# Altium PCB PCB1.pcbdoc (part 2 of 3)
Units mil, origin at the board's own origin, x right, y up, seen from the top; angles counter-clockwise.
Board outline 4471.89 x 4515.94 mil, 4 copper layers (Top Layer, Inner1, Inner2, Bottom Layer); 115 components, 147 nets, 637 pads, 517 vias.
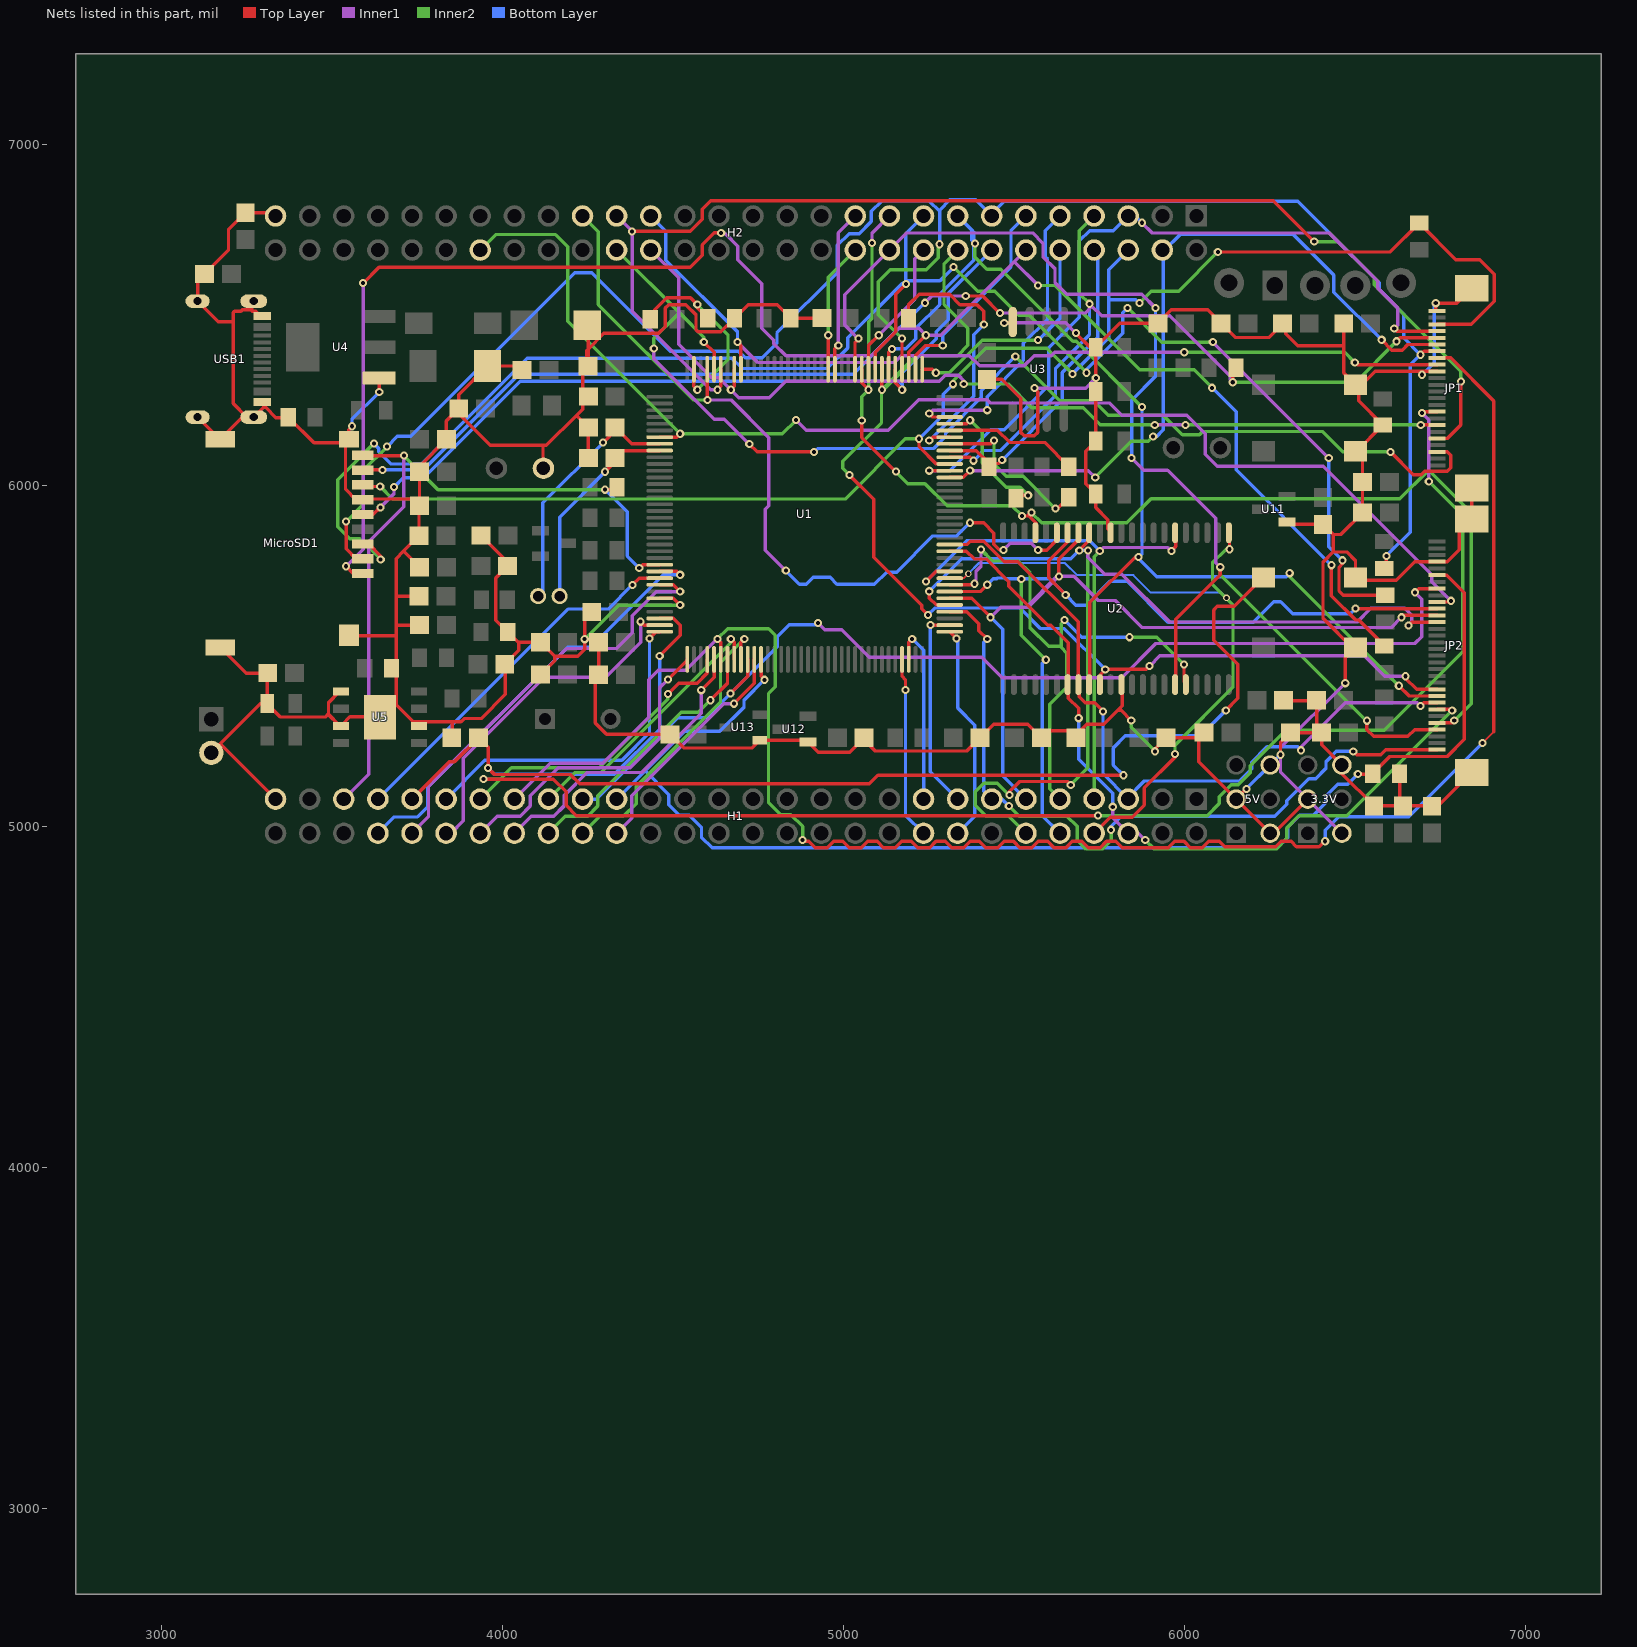
[diagram p4: the nets of this part, all layers, seen from the top]

## Via types
v1: diameter 24.02, hole 12.01, Top Layer to Bottom Layer, 515 vias
v2: diameter 19.68, hole 11.81, Top Layer to Bottom Layer, 2 vias

## Nets (pads, with @x,y where several pads share a name; then routed paths per layer and width w, separated by ;. In a path a pad name is that pad's centre, name@x,y a point inside that pad or via, vN(x,y) a via of type N, cw(c..) or ccw(c..) an arc to the next point about the centre after c; other vN are vias at no path point) (continued)
GND: 3.3V.2 3.3V.4 3.3V.6 5V.2 5V.4 5V.6 C1.1 C2.1 C3.1 C4.1 C5.2 C6.2 C7.1 C8.2 C9.2 C10.1 C11.1 C12.1 C13.1 C14.1 C15.1 C16.1 C17.1 C18.1 C19.1 C20.1 C21.1 C22.1 C23.1 C24.1 C25.1 C26.1 C27.2 C30.1 C31.1 C32.2 C35.1 C38.1 C40.1 C42.2 C47.1 C48.1 C49.1 C50.1 C55.1 C56.1 C83.2 C84.2 C85.2 C86.2 C87.2 C88.2 C89.2 C90.2 C91.2 D2.2 D4.2 D5.2 H1.55 H2.55 J1.2 JP1.15 JP1.24 JP1.25 JP1.26 JP2.29 JP2.33 JP2.34 KEY1.2 KEY2.2 KEY3.2 KEY4.2 L2.2 LED1.2 LED2.2 LED3.2 LED4.2 MicroSD1.6 MicroSD1.10 MicroSD1.11 MicroSD1.12 MicroSD1.13 R1.2 R2.2 R3.2 R8.2 R13.1 R14.1 U1.31 U2.12 U2.34 U3.4 U4.1 U5.1 U5.3 U5.6 U5.9 U11.1 U12.1 U13.1 USB1.1 USB1.2 USB1.3 USB1.4 USB1.A1 USB1.A12 USB1.B1 USB1.B12 | length 18530.7
  Top Layer w9.92: v1(4241.69,5549.88) 4241.69,5608.39 C55.1@4262.4,5629.09 ; U1.31@4461.69,5669.88 4501.69,5669.88 v1(4521.69,5649.88)
  Top Layer w10: USB1.4@3106.81,6200.87 3171.61,6136.06 MicroSD1.11@3173.23,6136.06 3238.03,6200.86 USB1.2@3251.38,6200.86 ; J1.2@3146.89,5216.73 3172.19,5242.04 ; MicroSD1.12@3173.23,5525.82 3249.62,5449.43 C30.1@3311.01,5449.43 ; 3267.01,6511.49 3266.38,6512.12 ; USB1.1@3271.38,6541.03 3266.38,6536.02 3266.38,6512.12 ; USB1.B1@3296.97,6250.86 USB1.A12@3296.97,6239.05 3306.29,6229.73 ; USB1.B12@3296.97,6491.02 USB1.A1@3285.97,6502.03 ; USB1.A1@3296.97,6502.83 USB1.A1@3285.97,6502.03 ; D4.2@3310.54,5360.94 D4.2@3311.01,5360.48 ; C30.1@3312.52,5450.94 C30.1@3311.01,5449.43 ; H1.55@3335.43,5080.94 3174.34,5242.04 3172.19,5242.04 ; H2.55@3335.43,6790.94 3326.06,6800.31 C16.1@3246.89,6800.31 3197.25,6750.67 3197.25,6690.67 C17.1@3127.52,6620.94 3106.81,6600.23 USB1.3@3106.81,6541.03 3166.97,6480.86 3211.38,6480.86 ; R8.2@3372.52,6200.94 R8.2@3373.78,6199.68 ; U5.3@3527.39,5295.94 U5.3@3530.53,5299.09 ; U5.1@3527.39,5395.94 3522.39,5395.94 3490.53,5364.09 3490.53,5331.59 ; MicroSD1.13@3551.18,5561.25 3552.01,5560.43 3689.03,5560.43 ; MicroSD1.10@3551.18,6136.06 MicroSD1.10@3549.39,6134.27 ; v1(3559.39,6174.27) 3549.39,6164.27 MicroSD1.10@3549.39,6134.27 ; U4.1@3638.5,6315.39 3639.39,6314.51 v1(3639.39,6274.27) ; U5.9@3641.89,5320.94 U5.9@3643.01,5322.07 ; R14.1@3675.67,5464.02 3676.77,5462.93 R14.1@3689.03,5462.93 ; C90.2@3756.26,5675.94 3755.74,5675.43 3689.03,5675.43 ; U5.6@3756.53,5296.09 3756.53,5307.93 ; C84.2@3757.52,5590.94 3757,5590.43 3689.03,5590.43 ; C83.2@3757.52,5760.94 3710.95,5807.52 3710.24,5807.52 ; C38.1@3852.02,5260.76 3854.03,5262.77 3854.03,5307.93 ; C18.1@3937.62,5854.07 4016.06,5775.63 C15.1@4016.06,5764.07 3981.26,5729.27 3981.26,5605.95 R13.1@4016.26,5570.94 4046.66,5540.54 4047.92,5540.54 ; C27.2@4007.31,5476.2 C27.2@4009.03,5477.93 ; C20.1@4058.21,6339.07 4046.34,6350.94 D5.2@3956.38,6350.94 3872.52,6267.09 C40.1@3872.52,6225.94 C40.1@3864.55,6217.97 ; C4.1@4112.52,5445.94 4153.58,5487 4153.58,5499.88 ; C31.1@4112.52,5540.94 C31.1@4112.92,5540.54 ; C32.2@4120.79,6050.94 4119.55,6052.19 4119.55,6117.97 ; D2.2@4249.83,6470.94 4252.02,6468.76 4252.02,6400.28 ; C3.1@4252.51,6080.77 C1.1@4252.51,6170.91 4218.09,6205.33 4218.09,6206.36 ; C5.2@4252.52,6260.94 4250.61,6259.04 C5.2@4235.77,6259.04 ; C14.1@4937.52,6491.48 4936.99,6490.94 R3.2@4846.26,6490.94 4806.26,6530.94 4721.26,6530.94 R2.2@4681.26,6490.94 4641.26,6450.94 4573.91,6450.94 4568.14,6456.71 4568.14,6500.94 4538.14,6530.94 4488.14,6530.94 4478.14,6520.94 4478.14,6466.41 4458.14,6446.41 4298.14,6446.41 4252.02,6400.28 ; C6.2@5061.26,5260.94 C6.2@5057.75,5257.44 ; C7.1@5421.89,6311.57 5464.91,6311.57 5520.54,6255.94 5520.54,6155.94 5530.54,6145.94 5560.54,6145.94 5570.54,6155.94 5570.54,6275.94 v1(5560.54,6285.94) ; v1(5472.01,6477.41) 5494.38,6477.41 U3.4@5496.89,6479.92 ; v1(5682.01,6447.41) 5722.01,6407.41 LED1.2@5742.01,6407.41 ; C49.1@5682.52,5260.94 C49.1@5678.43,5265.03 ; U2.34@5786.14,5863.6 5775.9,5873.85 5775.9,5900.59 5740.54,5935.94 LED4.2@5740.54,5975.94 5710.54,6005.94 5710.54,6100.94 LED3.2@5740.54,6130.94 LED2.2@5740.54,6275.94 v1(5740.54,6315.94) LED1.2@5740.54,6405.94 LED1.2@5742.01,6407.41 ; U2.12@5817.64,5418.28 5817.64,5354.24 5804.44,5341.05 ; v1(5844.44,5311.05) 5814.44,5341.05 5804.44,5341.05 ; v1(5914.44,5221.05) 5914.44,5229.13 C13.1@5946.26,5260.94 C12.1@6042.52,5260.94 ; C50.1@5922.52,6475.94 C50.1@5922.93,6476.35 ; C12.1@6057.52,5275.94 C12.1@6042.52,5260.94 ; v1(6181.89,5110.94) 5V.2@6151.89,5080.94 ; v1(6281.89,5210.94) 6281.89,5246.57 C87.2@6311.26,5275.94 C23.1@6388.76,5275.94 ; C11.1@6287.52,6475.94 C11.1@6288.88,6474.58 ; C24.1@6291.26,5370.94 6292.5,5369.7 C22.1@6388.76,5369.7 ; U11.1@6301.26,5893.54 6308.23,5886.57 C47.1@6406.89,5886.57 6436.64,5856.83 ; 3.3V.2@6361.89,5080.94 6261.89,4980.94 5V.4@6251.89,4980.94 5V.2@6151.89,5080.94 ; C22.1@6387.52,5370.94 C22.1@6388.76,5369.7 ; C48.1@6467.52,6475.94 6467.52,6410.39 ; v1(6471.89,5420.94) 6471.89,5495.87 KEY4.2@6496.64,5520.62 ; KEY4.2@6501.97,5525.94 KEY4.2@6496.64,5520.62 ; KEY3.2@6501.97,5730.94 KEY3.2@6501.97,5732.79 ; KEY2.2@6501.97,6100.94 KEY2.2@6503.08,6099.84 ; R1.2@6631.26,5155.94 C86.2@6631.26,5060.94 ; v1(6697.11,6325.16) v1@6697.11,6335.16 ; JP1.15@6741.2,6335.16 v1@6697.11,6335.16 ; JP1.24@6741.2,6512.32 6737.11,6516.41 v1(6737.11,6535.16) 6798.88,6535.16 JP1.25@6842.58,6578.86 ; JP2.34@6842.58,5159.29 6743.31,5060.02 C9.2@6726.21,5060.02 6725.28,5060.94 C86.2@6641.26,5060.94 C86.2@6631.26,5060.94 ; JP1.26@6842.58,5993.03 JP2.33@6842.58,5902.6 6806.56,5866.58 6806.56,5812.37 6771.2,5777.01 JP2.29@6741.2,5777.01 6676.18,5777.01 6621.97,5722.79 6511.97,5722.79 KEY3.2@6501.97,5732.79 ; 3172.19,5242.04 3290.63,5360.48 D4.2@3311.01,5360.48 ; 3211.38,6480.86 3211.38,6240.86 USB1.2@3251.38,6200.86 ; 3211.38,6480.86 3211.38,6507.88 3215,6511.49 3234.01,6511.49 3237.84,6515.32 3263.18,6515.32 3266.38,6512.12 ; USB1.2@3251.38,6200.86 USB1.2@3271.38,6200.87 3300.25,6229.73 3306.29,6229.73 ; 3266.38,6512.12 3266.38,6510.86 3277.13,6510.86 USB1.A1@3285.97,6502.03 ; 3306.29,6229.73 3336.34,6199.68 R8.2@3373.78,6199.68 ; D4.2@3311.01,5360.48 C30.1@3311.01,5449.43 ; D4.2@3311.01,5360.48 3349.9,5321.59 3480.53,5321.59 3490.53,5331.59 ; R8.2@3373.78,6199.68 3448.03,6125.43 MicroSD1.10@3540.55,6125.43 ; 3490.53,5331.59 3490.53,5329.09 3520.53,5299.09 U5.3@3530.53,5299.09 ; U5.3@3530.53,5299.09 3553.51,5322.07 U5.9@3643.01,5322.07 ; MicroSD1.10@3540.55,6125.43 3540.55,5988.89 3570.55,5958.89 MicroSD1.6@3590.55,5958.89 3592.6,5960.94 C19.1@3757.52,5960.94 ; MicroSD1.10@3540.55,6125.43 MicroSD1.10@3549.39,6134.27 ; U5.9@3643.01,5322.07 3678.37,5357.42 3689.53,5357.42 ; R14.1@3689.03,5462.93 3689.03,5357.93 3689.53,5357.42 ; R14.1@3689.03,5462.93 3689.03,5560.43 ; 3689.03,5560.43 3689.03,5590.43 ; 3689.03,5590.43 3689.03,5675.43 ; 3689.03,5675.43 3689.03,5786.3 3710.24,5807.52 ; 3689.53,5357.42 3739.03,5307.93 3756.53,5307.93 ; 3710.24,5807.52 C91.2@3755.89,5853.17 3755.89,5939.32 C19.1@3757.52,5940.94 C19.1@3757.52,5960.94 ; 3756.53,5307.93 3854.03,5307.93 ; C19.1@3757.52,5960.94 C21.1@3757.52,6040.94 3757.52,6057.2 C89.2@3836.26,6135.94 3836.26,6189.68 C40.1@3864.55,6217.97 ; 3854.03,5307.93 3879.03,5307.93 3888.32,5317.22 3938.32,5317.22 4009.03,5387.93 C27.2@4009.03,5477.93 ; C40.1@3864.55,6217.97 3964.55,6117.97 4119.55,6117.97 ; C27.2@4009.03,5477.93 4047.92,5516.82 4047.92,5540.54 ; 4047.92,5540.54 C31.1@4112.92,5540.54 ; C31.1@4112.92,5540.54 4153.58,5499.88 ; 4119.55,6117.97 4129.7,6117.97 4218.09,6206.36 ; 4153.58,5499.88 4221.69,5499.88 4241.69,5519.88 v1(4241.69,5549.88) 4273.58,5549.88 C26.1@4282.52,5540.94 C2.1@4282.51,5445.58 4272.52,5435.59 4272.52,5304.08 4305.66,5270.94 C25.1@4492.52,5270.94 4532.52,5230.94 4732.92,5230.94 U13.1@4755.52,5253.54 4891.26,5253.54 U12.1@4896.26,5248.54 4926.26,5218.54 5018.86,5218.54 C6.2@5057.75,5257.44 ; 4218.09,6206.36 4235.77,6224.04 C5.2@4235.77,6259.04 ; C5.2@4235.77,6259.04 4235.77,6334.04 C35.1@4248.14,6346.41 ; C35.1@4248.14,6346.41 4248.14,6396.41 4252.02,6400.28 ; C35.1@4248.14,6346.41 C35.1@4252.02,6350.28 4252.02,6400.28 ; C6.2@5057.75,5257.44 5093.11,5222.08 5362.4,5222.08 C85.2@5401.26,5260.94 5441.26,5300.94 5541.26,5300.94 C88.2@5581.26,5260.94 5601.26,5280.94 5662.52,5280.94 C49.1@5678.43,5265.03 ; C49.1@5678.43,5265.03 5713.79,5300.39 5763.79,5300.39 5804.44,5341.05 ; LED1.2@5742.01,6407.41 5810.95,6476.35 C50.1@5922.93,6476.35 ; C50.1@5922.93,6476.35 5961.82,6515.24 6068.22,6515.24 C56.1@6107.52,6475.94 6148.88,6434.58 6248.88,6434.58 C11.1@6288.88,6474.58 ; C12.1@6042.52,5260.94 6042.52,5190.31 5V.2@6151.89,5080.94 ; C11.1@6288.88,6474.58 6297.72,6465.75 6297.72,6445.75 6333.08,6410.39 6467.52,6410.39 ; C23.1@6388.76,5275.94 C22.1@6388.76,5369.7 ; C23.1@6388.76,5275.94 C23.1@6402.52,5275.94 6402.52,5240.31 3.3V.6@6461.89,5180.94 6461.89,5155.31 C8.2@6556.26,5060.94 C86.2@6631.26,5060.94 ; 6436.64,5805.62 6406.64,5775.62 6406.64,5610.62 KEY4.2@6496.64,5520.62 ; 6436.64,5805.62 6476.64,5805.62 6501.97,5780.29 KEY3.2@6501.97,5732.79 ; 6436.64,5805.62 6436.64,5856.83 ; 6436.64,5856.83 6458.4,5856.83 C10.1@6522.52,5920.94 C42.2@6522.52,6010.94 6522.52,6080.39 KEY2.2@6503.08,6099.84 ; 6467.52,6410.39 6467.52,6330.39 KEY1.2@6501.97,6295.94 KEY1.2@6511.18,6286.73 ; KEY2.2@6503.08,6099.84 6503.82,6099.84 L2.2@6581.89,6177.9 6511.18,6248.62 KEY1.2@6511.18,6286.73 ; KEY1.2@6511.18,6286.73 6559.61,6335.16 v1@6697.11,6335.16
  Inner1 w10: v1(5472.01,6477.41) 5652.01,6477.41 v1(5682.01,6447.41) ; v1(5560.54,6285.94) 5710.54,6285.94 v1(5740.54,6315.94) ; 3.3V.4@6461.89,4980.94 3.3V.2@6361.89,5080.94 6281.89,5160.94 v1(6281.89,5210.94) 6281.89,5230.94 v1(6471.89,5420.94)
  Inner2 w9.92: v1(4241.69,5549.88) 4341.69,5649.88 v1(4521.69,5649.88)
  Inner2 w10: v1(5844.44,5311.05) 5844.44,5291.05 v1(5914.44,5221.05)
  Bottom Layer w10: v1(3559.39,6174.27) 3559.39,6194.27 v1(3639.39,6274.27) ; v1(6181.89,5110.94) 5V.6@6251.89,5180.94 v1(6281.89,5210.94) ; v1(6697.11,6325.16) 6732.47,6360.52 6732.47,6530.52 v1(6737.11,6535.16)
I2C1_SCL: H2.35 JP1.5 U1.139 | length 3655.4
  Top Layer w9.92: v1(4380.83,6745.55) 4550.83,6745.55 4586.19,6780.9 4586.19,6810.9 4610.83,6835.55 6260.83,6835.55 v1(6380.83,6715.55) ; v1(4630.83,6281.14) 4640.83,6291.14 U1.139@4640.83,6341.14 ; JP1.5@6741.2,6138.3 6771.2,6138.3 6810.83,6177.93 v1(6810.83,6305.55)
  Inner1 w9.92: H2.35@4335.43,6790.94 v1(4380.83,6745.55) 4380.83,6511.14 4610.83,6281.14 v1(4630.83,6281.14)
  Inner2 w9.92: v1(6380.83,6715.55) 6450.83,6715.55 6556.9,6609.48 6556.9,6589.48 6810.83,6335.55 v1(6810.83,6305.55)
I2C1_SDA: H2.36 JP1.3 U1.140 | length 3461.5
  Top Layer w9.92: v1(4591.14,6421.14) 4621.14,6391.14 U1.140@4621.14,6341.14 ; v1(4724.49,6121.89) 4747.45,6098.93 v1(4914.49,6098.93) ; v1(6604.49,6098.93) 6671.2,6032.22 6694.49,6032.22 6704.49,6042.22 6771.2,6042.22 6781.2,6052.22 6781.2,6088.93 6771.2,6098.93 JP1.3@6741.2,6098.93
  Inner1 w9.92: v1(4444.49,6401.89) 4444.49,6371.89 4621.27,6195.11 4651.27,6195.11 v1(4724.49,6121.89)
  Inner2 w9.92: H2.36@4335.43,6690.94 4524.49,6501.89 ; v1(4444.49,6401.89) 4444.49,6431.89 4514.49,6501.89 4524.49,6501.89 ; v1(4591.14,6421.14) 4591.14,6435.24 4524.49,6501.89 ; v1(5504.49,6378.93) 5634.49,6248.93 5734.49,6248.93 5777.49,6205.93 5937.49,6205.93 5994.49,6148.93 6044.49,6148.93 6054.49,6158.93 6404.49,6158.93 6464.49,6098.93 v1(6604.49,6098.93)
  Bottom Layer w9.92: v1(4914.49,6098.93) 4924.49,6108.93 5264.49,6108.93 5299.85,6144.29 5299.85,6154.29 5404.49,6258.93 5404.49,6278.93 v1(5504.49,6378.93)
PA0: C38.2 H1.47 KEY3.1 U1.34 | length 4217.5
  Top Layer w9.92: C38.2@3930.76,5260.76 3958.71,5232.81 v1(3958.71,5171.76) 3977.36,5153.11 4199.41,5153.11 4226.69,5125.82 5076.69,5125.82 5101.69,5150.82 v1(5821.69,5150.82) ; v1(4461.69,5500.82) 4521.69,5560.82 4521.69,5590.82 4501.69,5610.82 U1.34@4461.69,5610.82 ; v1(6121.69,5340.82) 6157.05,5376.18 6157.05,5476.18 6086.34,5546.89 6086.34,5635.47 6097.01,5646.14 6147.01,5646.14 KEY3.1@6231.82,5730.94
  Top Layer w10: H1.47@3735.43,5080.94 3844.54,5190.05 3860.05,5190.05 C38.2@3930.76,5260.76
  Bottom Layer w9.92: v1(3958.71,5171.76) 3976.77,5153.7 4329.18,5153.7 4461.69,5286.21 v1(4461.69,5500.82) ; v1(5821.69,5150.82) 5791.69,5180.82 5791.69,5230.82 5827.05,5266.18 6047.05,5266.18 v1(6121.69,5340.82)
PA1: H1.46 U1.35 | length 1030.5
  Top Layer w9.92: v1(4405.63,5601.14) 4415.63,5591.14 U1.35@4461.69,5591.14
  Inner1 w10: H1.46@3835.43,4980.94 3849.81,4980.94 3886.22,5017.36 3886.22,5201.33 4123.51,5438.62 4303.55,5438.62 4405.63,5540.71 v1(4405.63,5601.14)
PA2: H1.45 U1.36 | length 991.3
  Top Layer w9.92: v1(4431.69,5551.45) 4451.69,5571.45 U1.36@4461.69,5571.45
  Bottom Layer w9.92: H1.45@3835.43,5080.94 3949.2,5194.71 4351.21,5194.71 4431.69,5275.2 v1(4431.69,5551.45)
PA3: H1.44 U1.37 | length 924.7
  Top Layer w9.92: v1(4485.68,5431.36) 4542.4,5488.08 U1.37@4542.4,5490.74
  Inner1 w9.92: H1.44@3935.43,4980.94 3985.23,5030.74 4052.4,5030.74 4082.4,5060.74 4082.4,5090.74 4164.18,5172.52 4376.03,5172.52 4461.03,5257.52 4461.03,5406.71 v1(4485.68,5431.36)
PA4: H1.43 JP1.9 U1.40 | length 4875.3
  Top Layer w9.92: v1(3944.8,5139.68) 4150.16,5139.68 4187.16,5102.68 4187.16,5062.68 4217.16,5032.68 v1(5746.84,5032.68) ; v1(4485.86,5388.86) 4517.74,5420.74 4571.46,5420.74 4601.46,5450.74 U1.40@4601.46,5490.74 ; v1(6696.84,6212.68) 6701.2,6217.04 JP1.9@6741.2,6217.04
  Inner1 w9.92: v1(6696.84,6212.68) 6716.84,6192.68 v1(6716.84,6012.68)
  Inner2 w9.92: H1.43@3935.43,5080.94 3994.17,5139.68 ; v1(3944.8,5139.68) 3994.17,5139.68 ; v1(4485.86,5388.86) 4485.86,5373.76 4284.61,5172.52 4027.01,5172.52 3994.17,5139.68 ; v1(5746.84,5032.68) 6066.84,5032.68 6102.19,5068.03 6102.19,5088.03 6137.55,5123.39 6157.55,5123.39 6192.9,5158.74 6192.9,5178.74 6296.84,5282.68 6586.84,5282.68 6816.84,5512.68 6816.84,5912.68 v1(6716.84,6012.68)
PA5: H1.42 U1.41 | length 884.9
  Top Layer w9.92: v1(4583.59,5400.42) 4621.14,5437.96 U1.41@4621.14,5490.74
  Inner1 w9.92: H1.42@4035.43,4980.94 4085.23,5030.74 4151.14,5030.74 4181.14,5060.74 4181.14,5090.74 4249.49,5159.09 4409.84,5159.09 4583.59,5332.84 v1(4583.59,5400.42)
PA6: H1.41 JP1.17 U1.42 | length 5342.6
  Top Layer w5.91: v1(6874.41,5245.71) 6907.42,5278.71
  Top Layer w9.92: v1(4630.83,5550.74) 4640.83,5540.74 U1.42@4640.83,5490.74 ; v1(4880.83,4960.74) 4884.27,4957.31 4899.05,4957.31 4917.85,4938.5 4953.01,4938.5 4971.82,4957.31 4999.05,4957.31 5017.85,4938.5 5053.01,4938.5 5071.82,4957.31 5099.05,4957.31 5117.85,4938.5 5153.01,4938.5 5171.82,4957.31 5199.05,4957.31 5217.85,4938.5 5253.01,4938.5 5271.82,4957.31 5299.05,4957.31 5317.85,4938.5 5353.01,4938.5 5371.82,4957.31 5399.05,4957.31 5417.85,4938.5 5453.01,4938.5 5471.82,4957.31 5499.05,4957.31 5517.85,4938.5 5553.01,4938.5 5571.82,4957.31 5599.05,4957.31 5617.85,4938.5 5653.01,4938.5 5671.82,4957.31 5699.05,4957.31 5717.85,4938.5 5753.01,4938.5 5771.82,4957.31 5799.05,4957.31 5818.37,4937.99 5894.94,4937.99 5895.45,4938.5 5953.01,4938.5 5971.82,4957.31 5999.05,4957.31 6017.85,4938.5 6053.01,4938.5 6071.82,4957.31 6102.96,4957.31 6118.81,4941.46 6268.25,4941.46 6284.1,4957.31 6312.96,4957.31 6328.81,4941.46 6394.97,4941.46 6410.82,4957.31 v1(6413.03,4957.31) ; JP1.17@6741.2,6374.53 6781.2,6374.53 6907.42,6248.31 6907.42,5278.71
  Inner1 w10: H1.41@4035.43,5080.94 4140.47,5185.98 4295,5185.98 4429.53,5320.51 4429.53,5430.75 4457.09,5458.31 4538.39,5458.31 v1(4630.83,5550.74)
  Inner2 w9.92: v1(4630.83,5550.74) 4660.83,5580.74 4780.83,5580.74 4800.83,5560.74 4800.83,5410.74 4780.83,5390.74 4780.83,5070.74 4816.19,5035.39 4846.19,5035.39 4880.83,5000.74 v1(4880.83,4960.74)
  Bottom Layer w10: v1(6413.03,4957.31) 6413.03,4989.05 6453.15,5029.17 6657.88,5029.17 v1(6874.41,5245.71)
PA7: H1.40 U1.43 | length 794.8
  Top Layer w9.92: v1(4610.51,5370.74) 4660.51,5420.74 U1.43@4660.51,5490.74
  Inner2 w9.92: H1.40@4135.43,4980.94 4185.23,5030.74 4250.51,5030.74 4280.51,5060.74 4280.51,5090.74 4525.16,5335.39 4575.16,5335.39 v1(4610.51,5370.74)
PA8: H2.8 R54.1 U1.100 | length 921
  Top Layer w9.92: U1.100@5312.09,6102.95 5390.51,6102.95 5425.87,6067.6 5425.87,6065.12 5425.87,6057.6 R54.1@5427.52,6055.94
  Top Layer w10: R54.1@5425.87,6065.12 5455.87,6065.12 v1(5465.87,6075.12)
  Bottom Layer w10: v1(5465.87,6075.12) 5642.64,6251.9 5642.64,6331.9 5745.87,6435.12 5745.87,6680.51 H2.8@5735.43,6690.94
PA9: R7.2 U1.101 | length 491
  Top Layer w9.92: U1.101@5312.09,6122.63 5432.09,6122.63 v1(5442.09,6132.63) ; v1(5622.09,5932.63) 5627.95,5932.63 R7.2@5661.26,5965.94
  Inner2 w9.92: v1(5442.09,6132.63) 5442.09,6062.63 5477.45,6027.28 5527.45,6027.28 v1(5622.09,5932.63)
PA10: R12.2 U1.102 | length 802.5
  Top Layer w9.92: R12.2@5191.26,6490.94 5191.26,6530.11 5222.09,6560.94 5312.09,6560.94 5342.09,6530.94 5392.09,6530.94 5412.09,6510.94 v1(5412.09,6472.32) ; v1(5252.09,6132.32) 5262.09,6142.32 U1.102@5312.09,6142.32
  Bottom Layer w9.92: v1(5252.09,6132.32) 5382.09,6262.32 5382.09,6442.32 v1(5412.09,6472.32)
PA11: R9.2 U1.103 | length 393.1
  Top Layer w9.92: U1.103@5312.09,6162 5452.09,6162 5487.45,6126.65 5590.56,6126.65 R9.2@5661.26,6055.94
PA12: R10.2 U1.104 | length 416.7
  Top Layer w9.92: U1.104@5312.09,6181.69 5362.09,6181.69 v1(5372.09,6191.69) ; R10.2@5506.76,5963.53 5514.92,5971.69 v1(5542.09,5971.69)
  Inner2 w9.92: v1(5372.09,6191.69) 5407.45,6156.34 5407.45,6066.34 5478.16,5995.63 5518.16,5995.63 v1(5542.09,5971.69)
PA13: H2.9 U1.105 | length 901.8
  Top Layer w9.92: v1(5252.09,6211.37) 5262.09,6201.37 U1.105@5312.09,6201.37
  Inner1 w9.92: v1(5252.09,6211.37) 5262.09,6221.37 v1(5422.09,6221.37)
  Bottom Layer w9.92: v1(5422.09,6221.37) 5422.09,6261.37 5528.16,6367.44 5528.16,6417.44 5598.87,6488.15 5598.87,6664.6 5592.09,6671.37 5592.09,6747.6 H2.9@5635.43,6790.94
PA14: H2.10 U1.109 | length 674.4
  Top Layer w9.92: U1.109@5231.38,6341.14 5261.38,6341.14 v1(5271.38,6331.14)
  Inner2 w9.92: v1(5271.38,6331.14) 5311.38,6331.14 5407.13,6426.89 v1(5571.38,6426.89)
  Bottom Layer w9.92: v1(5571.38,6426.89) 5635.43,6490.94 H2.10@5635.43,6690.94
PA15: H2.11 U1.110 | length 613.2
  Top Layer w9.92: U1.110@5211.69,6341.14 5211.69,6381.14 5241.69,6411.14 v1(5291.69,6411.14)
  Bottom Layer w9.92: v1(5291.69,6411.14) 5291.69,6441.14 5491.69,6641.14 5491.69,6747.2 H2.11@5535.43,6790.94
PB0: H1.37 JP2.25 U1.46 | length 3136.7
  Top Layer w9.92: v1(4669.57,5390.74) 4719.57,5440.74 U1.46@4719.57,5490.74 ; v1(6676.06,5687.24) 6687.1,5698.27 JP2.25@6741.2,5698.27
  Inner1 w9.92: v1(4926.06,5597.24) 4946.06,5577.24 4996.06,5577.24 5076.06,5497.24 5406.06,5497.24 5466.06,5437.24 5816.06,5437.24 5916.06,5537.24 6676.06,5537.24 6696.06,5557.24 6696.06,5667.24 v1(6676.06,5687.24)
  Bottom Layer w9.92: H1.37@4235.43,5080.94 4275.41,5080.94 4514.5,5320.03 4598.86,5320.03 v1(4669.57,5390.74) 4806.06,5527.24 4806.06,5557.24 4841.42,5592.59 4921.42,5592.59 v1(4926.06,5597.24)
PB1: H1.36 U1.47 | length 694.6
  Top Layer w9.92: v1(4679.25,5360.74) 4739.25,5420.74 U1.47@4739.25,5490.74
  Inner1 w9.92: H1.36@4335.43,4980.94 4379.25,5024.76 4379.25,5090.74 4649.25,5360.74 v1(4679.25,5360.74)
PB2: H1.35 JP2.27 R1.1 U1.48 | length 3878.1
  Top Layer w9.92: U1.48@4758.94,5490.74 4758.94,5440.74 v1(4768.94,5430.74) ; v1(6508.77,5154.28) 6550.85,5154.28 R1.1@6552.52,5155.94
  Top Layer w10: R1.1@6552.52,5155.94 6602.52,5205.94 6771.2,5205.94 6821.2,5255.94 6821.2,5685.94 6769.51,5737.64 JP2.27@6741.2,5737.64
  Bottom Layer w9.92: H1.35@4335.43,5080.94 4418.77,5164.28 ; v1(4768.94,5430.74) 4708.94,5370.74 4708.94,5350.74 4638.23,5280.03 4534.52,5280.03 4418.77,5164.28 ; v1(6508.77,5154.28) 6479.48,5124.99 6449.48,5124.99 6414.12,5089.63 6414.12,5069.63 6378.77,5034.28 6338.77,5034.28 6304.12,4999.63 6304.12,4969.63 6272.28,4937.79 4615.25,4937.79 4584.12,4968.92 4584.12,4998.92 4548.77,5034.28 4518.77,5034.28 4488.77,5064.28 4488.77,5094.28 4418.77,5164.28
PB6: H2.33 JP1.16 U1.136 | length 2687.8
  Top Layer w9.92: v1(4689.88,6421.14) 4699.88,6411.14 U1.136@4699.88,6341.14 ; v1(6499.88,6361.14) 6506.19,6354.84 JP1.16@6741.2,6354.84
  Inner1 w9.92: v1(4689.88,6421.14) 4749.88,6361.14 5149.88,6361.14 5169.88,6381.14 5369.88,6381.14 5399.88,6351.14 5529.88,6351.14 5559.88,6381.14 5609.88,6381.14 5619.88,6391.14 v1(5999.88,6391.14)
  Inner2 w9.92: v1(5999.88,6391.14) 6469.88,6391.14 v1(6499.88,6361.14)
  Bottom Layer w9.92: H2.33@4435.43,6790.94 4479.88,6746.5 4479.88,6661.14 4689.88,6451.14 v1(4689.88,6421.14)
PB7: H2.34 JP1.7 U1.137 | length 2756.8
  Top Layer w9.92: v1(4670.2,6281.14) 4680.2,6291.14 U1.137@4680.2,6341.14 ; v1(6693.19,6178.16) 6740.71,6178.16 JP1.7@6741.2,6177.67
  Inner1 w9.92: H2.34@4435.43,6690.94 4517.21,6609.17 4517.21,6414.14 4614.85,6316.5 4634.85,6316.5 v1(4670.2,6281.14) 4693.19,6258.16 4783.19,6258.16 4831.16,6306.13 5281.16,6306.13 5298.54,6323.52 5337.83,6323.52 5353.19,6308.16 v1(5353.19,6298.16) ; v1(5913.19,6178.16) v1(6003.19,6178.16)
  Inner2 w9.92: v1(5353.19,6298.16) 5483.19,6298.16 5553.19,6228.16 5703.19,6228.16 5753.19,6178.16 v1(5913.19,6178.16) ; v1(6003.19,6178.16) v1(6693.19,6178.16)
PB10: H1.18 U1.69 | length 535.9
  Top Layer w9.92: U1.69@5172.32,5490.74 5172.32,5440.74 5182.32,5430.74 v1(5182.32,5400.74)
  Bottom Layer w9.92: v1(5182.32,5400.74) 5182.32,5034.06 H1.18@5235.43,4980.94
PB11: H1.17 U1.70 | length 547.8
  Top Layer w9.92: U1.70@5192.01,5490.74 5192.01,5540.74 v1(5202.01,5550.74)
  Bottom Layer w9.92: v1(5202.01,5550.74) 5235.43,5517.32 H1.17@5235.43,5080.94
PB12: H1.16 U1.73 | length 641.6
  Top Layer w9.92: U1.73@5312.09,5571.45 v1(5332.09,5551.45)
  Bottom Layer w9.92: v1(5332.09,5551.45) 5335.43,5548.11 5335.43,5348.11 5385.43,5298.11 5385.43,5030.94 H1.16@5335.43,4980.94
PB13: H1.15 U1.74 | length 600
  Top Layer w9.92: v1(5255.43,5591.14) U1.74@5312.09,5591.14
  Bottom Layer w9.92: v1(5255.43,5591.14) 5255.43,5160.94 H1.15@5335.43,5080.94
PB15: H1.13 JP2.1 U1.76 | length 2197.9
  Top Layer w9.92: U1.76@5312.09,5630.51 5362.09,5630.51 5397.45,5595.16 5397.45,5575.16 v1(5422.09,5550.51)
  Top Layer w10: v1(6495.43,5220.94) 6505.43,5210.94 6575.43,5210.94 6590.32,5225.83 JP2.1@6741.2,5225.83
  Inner2 w10: v1(5485.43,5060.94) 5515.43,5030.94 5655.43,5030.94 5685.43,5000.94 5685.43,4960.94 5711.7,4934.68 5759.17,4934.68 5785.43,4960.94 v1(5785.43,4990.94)
  Bottom Layer w9.92: v1(5422.09,5550.51) 5412.09,5540.51 5412.09,5104.29 H1.13@5435.43,5080.94
  Bottom Layer w10: H1.13@5435.43,5080.94 5465.43,5080.94 v1(5485.43,5060.94) ; v1(5785.43,4990.94) 5785.43,5000.94 5815.43,5030.94 6265.43,5030.94 6300.79,5066.3 6300.79,5076.3 6365.43,5140.94 6385.43,5140.94 6415.43,5170.94 6415.43,5190.94 6445.43,5220.94 v1(6495.43,5220.94)
PC0: H1.51 MicroSD1.CD R32.2 U1.26 | length 2206.4
  Top Layer w9.92: v1(4301.69,5988.3) 4328.62,5988.3 R32.2@4336.26,5995.94 ; v1(4401.69,5758.3) 4411.69,5768.3 U1.26@4461.69,5768.3
  Top Layer w10: MicroSD1.CD@3590.55,6088.81 3591.06,6088.3 v1(3711.69,6088.3)
  Inner1 w10: H1.51@3535.43,5080.94 3608.62,5154.13 3608.62,5835.23 3711.69,5938.3 v1(3711.69,6088.3)
  Inner2 w10: v1(3711.69,6088.3) 3811.69,5988.3 v1(4301.69,5988.3)
  Bottom Layer w9.92: v1(4301.69,5988.3) 4366.34,5923.66 4366.34,5793.66 v1(4401.69,5758.3)
PC1: H1.50 U1.27 | length 1297.8
  Top Layer w9.92: U1.27@4461.69,5748.62 4511.69,5748.62 v1(4521.69,5738.62)
  Bottom Layer w9.92: H1.50@3635.43,4980.94 3683.11,5028.62 3751.69,5028.62 3781.69,5058.62 3781.69,5115.84 4192.34,5526.49 4259.56,5526.49 4471.69,5738.62 v1(4521.69,5738.62)
PC2: H1.49 U1.28 | length 1094.7
  Top Layer w9.92: v1(4381.69,5708.93) 4401.69,5728.93 U1.28@4461.69,5728.93
  Bottom Layer w9.92: H1.49@3635.43,5080.94 4192.71,5638.22 4310.98,5638.22 v1(4381.69,5708.93)
PC3: H1.48 U1.29 | length 1229.1
  Top Layer w9.92: U1.29@4461.69,5709.25 4501.69,5709.25 v1(4521.69,5689.25)
  Inner1 w9.92: H1.48@3735.43,4980.94 3783.74,5029.25 3783.74,5117.9 4188.35,5522.51 4334.94,5522.51 4381.69,5569.25 4381.69,5619.25 4451.69,5689.25 v1(4521.69,5689.25)
PC4: H1.39 U1.44 | length 800.3
  Top Layer w9.92: v1(4670.2,5550.74) 4680.2,5540.74 U1.44@4680.2,5490.74
  Inner2 w9.92: H1.39@4135.43,5080.94 4213.58,5159.09 4290.18,5159.09 4670.2,5539.12 v1(4670.2,5550.74)
PC5: H1.38 U1.45 | length 871.5
  Top Layer w9.92: U1.45@4699.88,5490.74 4699.88,5540.74 v1(4709.88,5550.74)
  Inner2 w9.92: H1.38@4235.43,4980.94 4287.04,5032.55 4357.04,5032.55 4392.39,5067.9 4392.39,5117.9 4639.88,5365.39 4639.88,5480.74 v1(4709.88,5550.74)
PC6: H2.4 JP1.19 U1.96 | length 2229.3
  Top Layer w9.92: U1.96@5312.09,6024.21 5352.09,6024.21 v1(5372.09,6044.21)
  Top Layer w10: v1(6578.7,6427.67) 6608.7,6397.67 6638.7,6397.67 6654.93,6413.9 JP1.19@6741.2,6413.9
  Inner1 w9.92: v1(5372.09,6044.21) 5718.7,6044.21 v1(5738.7,6024.21)
  Inner2 w9.92: v1(5738.7,6024.21) 5844.77,6130.28 5894.77,6130.28 v1(5908.7,6144.21)
  Bottom Layer w9.92: v1(5908.7,6144.21) 5918.7,6144.21 5938.7,6164.21 5938.7,6687.67 H2.4@5935.43,6690.94
  Bottom Layer w10: H2.4@5938.7,6687.67 5988.7,6737.67 6318.7,6737.67 6438.7,6617.67 6438.7,6567.67 v1(6578.7,6427.67)
PC7: H2.5 JP1.21 U1.97 | length 2254.9
  Top Layer w9.92: v1(5252.09,6043.89) U1.97@5312.09,6043.89
  Top Layer w10: v1(6615.43,6460.94) 6623.11,6453.27 JP1.21@6741.2,6453.27
  Inner1 w10: v1(5875.43,6770.94) 5905.43,6740.94 6425.43,6740.94 6566.86,6599.52 6566.86,6579.52 6625.43,6520.94 6625.43,6470.94 v1(6615.43,6460.94)
  Bottom Layer w9.92: v1(5252.09,6043.89) 5312.09,6043.89 5432.09,6163.89 5472.09,6163.89 5602.09,6293.89 5602.09,6403.89 5692.09,6493.89 5692.09,6717.6 5722.09,6747.6 5792.09,6747.6 H2.5@5835.43,6790.94
  Bottom Layer w10: H2.5@5835.43,6790.94 5855.43,6790.94 v1(5875.43,6770.94)
PC8: H2.6 JP1.22 MicroSD1.7 R30.2 U1.98 | length 4489.4
  Top Layer w9.92: MicroSD1.7@3590.55,6002.2 3595.15,5997.6 v1(3642.09,5997.6) ; v1(5222.09,6137.6) 5222.09,6113.58 5272.09,6063.58 U1.98@5312.09,6063.58
  Top Layer w10: v1(6098.16,6685.29) 6603.81,6685.29 R30.2@6688.66,6770.14 ; R30.2@6689.1,6770.57 R30.2@6688.66,6770.14 ; JP1.22@6741.2,6472.95 6841.47,6472.95 6908.66,6540.14 6908.66,6620.14 6865.77,6663.03 6795.77,6663.03 R30.2@6688.66,6770.14
  Inner2 w9.92: v1(3642.09,5997.6) 3678.87,5960.82 5005.31,5960.82 5182.09,6137.6 v1(5222.09,6137.6) ; v1(5322.09,6297.6) 5322.09,6307.6 5417.07,6402.58 5597.12,6402.58 v1(5672.09,6327.6)
  Inner2 w10: v1(5868.16,6535.29) 5903.51,6570.64 5983.51,6570.64 v1(6098.16,6685.29)
  Bottom Layer w9.92: v1(5222.09,6137.6) 5292.8,6208.31 5292.8,6268.31 v1(5322.09,6297.6) ; v1(5672.09,6327.6) 5778.16,6433.67 5778.16,6545.29 5778.16,6633.67 H2.6@5835.43,6690.94
  Bottom Layer w10: 5778.16,6545.29 5858.16,6545.29 v1(5868.16,6535.29)
PC9: H2.7 JP1.20 MicroSD1.8 R31.2 U1.99 | length 4592.2
  Top Layer w9.92: MicroSD1.8@3590.55,6045.5 3591.24,6046.19 v1(3649.16,6046.19) ; U1.99@5312.09,6083.26 5372.09,6083.26 v1(5382.09,6073.26) ; v1(5359.16,6556.19) 5409.16,6556.19 v1(5459.16,6506.19)
  Top Layer w10: v1(6142.09,6303.26) 6142.09,6336.77 R31.2@6151.26,6345.94 ; v1(6622.09,6423.26) 6632.41,6433.58 JP1.20@6741.2,6433.58
  Inner1 w9.92: v1(5239.16,6536.19) 5259.16,6556.19 v1(5359.16,6556.19) ; v1(5459.16,6506.19) 5709.16,6506.19 v1@5729.16,6526.19
  Inner1 w10: v1(5722.09,6533.26) 5729.16,6526.19 5757.45,6497.91 5957.45,6497.91 6134.22,6321.13 6134.22,6311.13 v1(6142.09,6303.26)
  Inner2 w9.92: v1(5722.09,6533.26) 5692.09,6563.26 5692.09,6747.6 H2.7@5735.43,6790.94
  Inner2 w10: v1(6142.09,6303.26) 6502.09,6303.26 v1(6622.09,6423.26)
  Bottom Layer w9.92: v1(3649.16,6046.19) 3769.16,6046.19 4049.16,6326.19 5029.16,6326.19 v1(5239.16,6536.19) ; v1(5382.09,6073.26) 5412.09,6103.26 5462.09,6103.26 5622.09,6263.26 5622.09,6343.26 5722.09,6443.26 v1(5722.09,6533.26)
PC10: H2.12 MicroSD1.1 R25.2 U1.111 | length 5154.8
  Top Layer w9.92: v1(3542.01,5763.81) 3563.47,5742.35 MicroSD1.1@3590.55,5742.35 ; v1(3592.01,6593.81) 3638.63,6640.43 4551.3,6640.43 4586.66,6675.79 4586.66,6705.79 4622.01,6741.14 v1(4642.01,6741.14) ; U1.111@5192.01,6341.14 5192.01,6391.14 v1(5242.01,6441.14)
  Top Layer w10: v1(6431.36,5766.88) 6431.36,5676.88 6502.08,5606.16 6511.04,5606.16 R25.2@6586.89,5530.31
  Inner1 w9.92: v1(3542.01,5763.81) 3592.01,5813.81 v1(3592.01,6593.81) ; v1(4642.01,6741.14) 4645.23,6737.92 4655.23,6737.92 4690.59,6702.57 4690.59,6662.57 4761.3,6591.86 4761.3,6461.86 4796.66,6426.5 4796.66,6416.5 4832.01,6381.14 5082.01,6381.14 5162.01,6461.14 5222.01,6461.14 v1(5242.01,6441.14) 5285.63,6441.14 5501.36,6656.88 H2.12@5535.43,6690.94
  Inner1 w10: 5501.36,6656.88 v1(5571.36,6586.88)
  Inner2 w10: v1(5571.36,6586.88) 5621.36,6586.88 5868.85,6339.39 6028.85,6339.39 v1(6081.36,6286.88)
  Bottom Layer w10: v1(6081.36,6286.88) 6152.08,6216.16 6152.08,6046.16 v1(6431.36,5766.88)
PC11: H2.13 JP1.18 MicroSD1.2 R27.2 U1.112 | length 5686.3
  Top Layer w9.92: v1(3542.32,5894.57) 3542.32,5814.57 3571.22,5785.66 MicroSD1.2@3590.55,5785.66 ; U1.112@5172.32,6341.14 v1(5172.32,6431.14)
  Top Layer w10: R27.2@6586.26,5757.2 6592.4,5763.34 v1(6592.4,5793.98) ; v1(6692.4,6383.98) 6702.62,6394.21 JP1.18@6741.2,6394.21
  Inner2 w9.92: v1(3542.32,5894.57) 3591.61,5943.86 3591.61,6043.86 v1(3662.32,6114.57) ; v1(5172.32,6431.14) 5102.32,6501.14 5102.32,6597.83 5137.68,6633.19 5243.44,6633.19 5278.8,6668.54 5278.8,6704.31 v1(5282.32,6707.83)
  Bottom Layer w9.92: v1(3662.32,6114.57) 3692.32,6144.57 3732.32,6144.57 4212.32,6624.57 4262.32,6624.57 4492.32,6394.57 4692.32,6394.57 4712.32,6374.57 4762.32,6374.57 4805.54,6417.79 4805.54,6447.79 4982.32,6624.57 4982.32,6704.57 5016.97,6739.21 5046.97,6739.21 5082.32,6774.57 5082.32,6804.57 5112.32,6834.57 5252.32,6834.57 5282.32,6804.57 ; v1(5282.32,6707.83) 5282.32,6804.57 ; H2.13@5435.43,6790.94 5432.4,6793.98 5388.55,6837.83 5312.32,6837.83 5282.32,6807.83 5282.32,6804.57
  Bottom Layer w10: H2.13@5432.4,6793.98 5472.4,6833.98 6332.4,6833.98 6572.4,6593.98 6572.4,6573.98 6643.11,6503.27 6643.11,6433.27 v1(6692.4,6383.98) 6662.4,6353.98 6662.4,5863.98 v1(6592.4,5793.98)
PC12: H2.14 MicroSD1.5 U1.113 | length 2346.6
  Top Layer w9.92: MicroSD1.5@3590.55,5915.58 3622.2,5915.58 v1(3642.64,5936.03) ; U1.113@5152.64,6341.14 5152.64,6301.14 v1(5172.64,6281.14)
  Inner1 w9.92: v1(3642.64,5936.03) 3682.64,5976.03 v1(3682.64,5996.03)
  Bottom Layer w9.92: v1(3682.64,5996.03) 3709.8,6023.18 3769.8,6023.18 4052.64,6306.03 5162.64,6306.03 5172.64,6296.03 ; v1(5172.64,6281.14) 5172.64,6296.03 ; H2.14@5435.43,6690.94 5308,6563.51 5308,6486.5 5272.64,6451.14 5272.64,6431.14 5172.64,6331.14 5172.64,6296.03
PC13: H2.44 JP2.23 U1.7 | length 3698.6
  Top Layer w9.92: U1.7@4461.69,6142.32 4511.69,6142.32 v1(4521.69,6152.32) ; JP2.23@6741.2,5658.9 6778.27,5658.9 v1(6781.69,5662.32)
  Inner1 w9.92: v1(4861.69,6192.32) 4891.69,6162.32 5131.69,6162.32 5221.69,6252.32 5421.69,6252.32 5431.69,6242.32 5781.69,6242.32 5817.05,6206.97 6007.05,6206.97 6061.69,6152.32 6061.69,6092.32 6097.05,6056.97 6407.05,6056.97 6725.24,5738.77 6725.24,5718.77 v1(6781.69,5662.32)
  Inner2 w9.92: H2.44@3935.43,6690.94 3980.79,6736.3 4156.34,6736.3 4191.69,6700.94 4191.69,6482.32 v1(4521.69,6152.32) 4821.69,6152.32 v1(4861.69,6192.32)
PC14: C1.2 U1.8 Y1.2 | length 736.4
  Top Layer w9.92: C1.2@4331.25,6170.91 4335.68,6166.48 4379.52,6122.63 U1.8@4461.69,6122.63
  Top Layer w10: v1(4295.68,6126.48) C1.2@4335.68,6166.48
  Bottom Layer w10: Y1.2@4105.39,5675.94 4118.9,5689.46 4118.9,5949.71 v1(4295.68,6126.48)
PC15: C3.2 U1.9 Y1.1 | length 611.9
  Top Layer w9.92: C3.2@4331.25,6080.77 4353.44,6102.95 U1.9@4461.69,6102.95
  Top Layer w10: v1(4301.25,6040.77) 4331.25,6070.77 C3.2@4331.25,6080.77
  Bottom Layer w10: Y1.1@4168.39,5675.94 4168.39,5907.9 v1(4301.25,6040.77)
PD0: H2.15 JP2.9 U1.114 U2.9 | length 3296.3
  Top Layer w9.92: U1.114@5132.95,6341.14 5132.95,6391.14 v1(5142.95,6401.14) ; U2.9@5723.15,5418.28 5723.15,5657.66 5855.94,5790.44 v1(5865.94,5790.44)
  Top Layer w10: v1(6628.92,5413.43) 6659.04,5383.31 JP2.9@6741.2,5383.31
  Inner2 w9.92: v1(5385.94,6710.44) 5385.94,6670.44 5421.29,6635.09 5461.29,6635.09 5673.42,6422.96 5683.42,6422.96 v1(5875.94,6230.44)
  Inner2 w10: v1(6308.92,5743.43) 6308.92,5733.43 v1(6628.92,5413.43)
  Bottom Layer w9.92: v1(5142.95,6401.14) 5182.95,6401.14 5212.95,6431.14 5212.95,6461.14 5282.95,6531.14 5282.95,6561.14 5382.95,6661.14 v1@5382.95,6713.43 ; H2.15@5335.43,6790.94 5375.94,6750.44 ; v1(5385.94,6710.44) v1@5382.95,6713.43 ; v1(5865.94,5790.44) 5868.92,5793.43 5875.94,5800.44 v1(5875.94,6230.44) ; 5375.94,6750.44 5375.94,6720.44 v1@5382.95,6713.43 ; 5375.94,6750.44 5382.95,6743.43 v1@5382.95,6713.43
  Bottom Layer w10: v1@5868.92,5793.43 5868.92,5783.43 5918.92,5733.43 6298.92,5733.43 v1(6308.92,5743.43)
PD1: H2.16 JP2.10 U1.115 U2.10 | length 3330.6
  Top Layer w9.92: v1(5018.23,6031.14) 5088.94,5960.43 5088.94,5790.43 5230.36,5649.01 5230.36,5639.01 v1(5248.23,5621.14) ; v1(5113.27,6281.14) U1.115@5113.27,6341.14 ; U2.10@5754.65,5418.28 5754.65,5447.56 v1(5768.23,5461.14)
  Top Layer w10: v1(5768.23,5461.14) 5888.23,5461.14 v1(5898.23,5471.14) ; v1(6648.23,5441.14) 6648.23,5435.96 6681.2,5402.99 JP2.10@6741.2,5402.99
  Inner1 w10: v1(5898.23,5471.14) 5928.23,5501.14 6528.23,5501.14 6588.23,5441.14 v1(6648.23,5441.14)
  Inner2 w9.92: v1(5018.23,6031.14) 4998.23,6051.14 4998.23,6071.14 5112.17,6185.08 5112.17,6275.08 5218.23,6381.14 ; v1(5113.27,6281.14) 5213.27,6381.14 5218.23,6381.14 ; H2.16@5335.43,6690.94 5295.43,6650.94 5295.43,6531.14 5365.43,6461.14 5365.43,6411.14 5335.43,6381.14 5218.23,6381.14
  Bottom Layer w9.92: v1(5248.23,5621.14) 5268.23,5641.14 5518.23,5641.14 5578.23,5581.14 5648.23,5581.14 v1(5768.23,5461.14)
PD2: H2.17 MicroSD1.3 R28.2 U1.116 | length 5130.2
  Top Layer w9.92: MicroSD1.3@3590.55,5828.97 3608.23,5828.97 3643.58,5793.63 v1(3643.58,5783.63) ; U1.116@5093.58,6341.14 5093.58,6391.14 5153.58,6451.14 5153.58,6561.14 v1(5183.58,6591.14) ; v1(6463.58,5781.07) 6463.58,5771.07 6453.58,5761.07 6453.58,5691.07 6465.72,5678.93 R28.2@6588.47,5678.93
  Inner1 w9.92: v1(6083.58,6421.07) v1(6423.58,6081.07)
  Inner2 w9.92: v1(3623.58,6123.63) 3517.51,6017.56 3517.51,5879.69 3552.87,5844.34 3582.87,5844.34 v1(3643.58,5783.63) ; v1(5323.58,6641.07) 5394.29,6570.36 5444.29,6570.36 5515,6499.65 5545,6499.65 v1(5713.58,6331.07) ; v1(5833.58,6521.07) 5933.58,6421.07 v1(6083.58,6421.07)
  Bottom Layer w9.92: v1(3623.58,6123.63) 3638.23,6108.98 3638.23,6098.98 3673.58,6063.63 3763.58,6063.63 4073.58,6373.63 4673.58,6373.63 4703.58,6343.63 4953.58,6343.63 5013.58,6403.63 5013.58,6433.63 5173.58,6593.63 v1@5183.58,6593.63 ; v1(5183.58,6591.14) v1@5183.58,6593.63 ; H2.17@5235.43,6790.94 5183.58,6739.09 v1@5183.58,6601.07 ; v1(5323.58,6641.07) 5283.58,6601.07 v1@5183.58,6601.07 ; v1(5713.58,6331.07) 5713.58,6341.07 5819.65,6447.13 5819.65,6507.13 v1(5833.58,6521.07) ; v1(6423.58,6081.07) 6423.58,5821.07 v1(6463.58,5781.07) ; v1@5183.58,6593.63 v1@5183.58,6601.07
PD3: H2.18 U1.117 | length 416.7
  Top Layer w9.92: U1.117@5073.9,6341.14 5073.9,6411.14 v1(5103.9,6441.14)
  Inner1 w9.92: v1(5103.9,6441.14) 5209.97,6547.21 5209.97,6665.48 H2.18@5235.43,6690.94
PD4: H2.19 JP2.5 U1.118 U2.41 | length 3505.6
  Top Layer w9.92: v1(5054.21,6191.14) 5054.21,6141.14 v1(5154.21,6041.14) ; U1.118@5054.21,6341.14 5054.21,6301.14 v1(5074.21,6281.14) ; v1(5524.21,5911.14) 5541.57,5911.14 5544.21,5911.14 5565.67,5889.68 U2.41@5565.67,5863.6
  Top Layer w10: 5541.57,5911.14 v1(5551.57,5921.14) ; JP2.5@6741.2,5304.57 6785,5304.57 v1(6791.57,5311.14)
  Inner1 w9.92: v1(5084.21,6711.14) 5084.21,6739.72 H2.19@5135.43,6790.94
  Inner2 w9.92: v1(5054.21,6191.14) 5054.21,6261.14 v1(5074.21,6281.14) 5074.21,6481.14 5084.21,6491.14 v1(5084.21,6711.14) ; v1(5154.21,6041.14) 5189.57,6005.79 5239.57,6005.79 5304.21,5941.14 5494.21,5941.14 v1(5524.21,5911.14)
  Inner2 w10: v1(5551.57,5921.14) 5581.57,5891.14 5831.57,5891.14 5902.28,5961.86 6632.28,5961.86 6711.57,6041.14 6721.57,6041.14 6841.57,5921.14 6841.57,5361.14 v1(6791.57,5311.14)
PD5: H2.20 JP2.4 U1.119 U2.17 | length 3575.7
  Top Layer w9.92: U1.119@5034.53,6341.14 5034.53,6421.14 v1(5044.53,6431.14) ; U2.17@5975.12,5418.28 5975.12,5608.12 6105.43,5738.43 v1(6105.43,5760.94)
  Top Layer w10: v1(6535.43,5310.94) 6535.43,5284.88 6555.43,5264.88 6655.43,5264.88 6675.43,5284.88 JP2.4@6741.2,5284.88
  Inner1 w9.92: v1(5044.53,6431.14) 5004.53,6471.14 5004.53,6560.04 H2.20@5135.43,6690.94 5185.43,6740.94 5555.43,6740.94 5585.43,6710.94 5585.43,6670.94 5620.79,6635.59 5620.79,6595.59 5655.43,6560.94 5875.43,6560.94 v1(5915.43,6520.94) ; v1(5845.43,6080.94) 5880.79,6045.59 5950.79,6045.59 6092.21,5904.17 6092.21,5774.17 v1(6105.43,5760.94)
  Inner2 w10: v1(6105.43,5760.94) 6105.43,5738.6 6533.09,5310.94 v1(6535.43,5310.94)
  Bottom Layer w9.92: v1(5845.43,6080.94) 5845.43,6250.94 5915.43,6320.94 v1(5915.43,6520.94)
PD6: H2.21 U1.122 | length 474.6
  Top Layer w9.92: U1.122@4975.47,6341.14 4975.47,6401.14 v1(4985.47,6411.14)
  Inner1 w9.92: v1(4985.47,6411.14) 4985.47,6740.98 H2.21@5035.43,6790.94
PD7: H2.22 U1.123 | length 382.8
  Top Layer w9.92: U1.123@4955.79,6341.14 v1(4955.79,6441.14)
  Inner2 w9.92: v1(4955.79,6441.14) 4955.79,6611.3 H2.22@5035.43,6690.94
PD8: H1.12 JP2.20 U1.77 U2.36 | length 3127.2
  Top Layer w9.92: v1(5252.09,5690.19) 5252.09,5670.19 5272.09,5650.19 U1.77@5312.09,5650.19 ; v1(5487.1,5092.61) 5487.1,5102.61 5517.1,5132.61 5657.1,5132.61 v1(5667.1,5122.61) ; v1(5692.09,5810.19) 5723.15,5841.25 U2.36@5723.15,5863.6
  Top Layer w10: v1(6657.1,5590.19) 6666.75,5599.84 JP2.20@6741.2,5599.84
  Inner1 w10: v1(5717.1,5810.19) 5717.1,5790.19 5767.1,5740.19 5817.1,5740.19 5957.1,5600.19 6507.1,5600.19 6547.1,5640.19 6647.1,5640.19 6667.1,5620.19 6667.1,5600.19 v1(6657.1,5590.19)
  Inner2 w9.92: v1(5487.1,5092.61) 5451.75,5127.97 5412.46,5127.97 5387.1,5102.61 5387.1,5062.61 5417.1,5032.61 5483.77,5032.61 H1.12@5535.43,4980.94 ; v1(5667.1,5122.61) 5717.1,5172.61 v1(5717.1,5810.19)
  Bottom Layer w9.92: v1(5252.09,5690.19) 5347.14,5785.24 5667.14,5785.24 v1(5692.09,5810.19) v1(5717.1,5810.19)
PD9: H1.11 JP2.21 U1.78 U2.37 | length 2441.8
  Top Layer w9.92: U1.78@5312.09,5669.88 5376.25,5669.88 v1(5432.09,5614.04) ; v1(5632.09,5734.04) 5632.09,5784.04 5691.65,5843.6 U2.37@5691.65,5863.6
  Top Layer w10: v1(6636.5,5614.04) 6641.99,5619.53 JP2.21@6741.2,5619.53
  Inner1 w9.92: v1(5432.09,5614.04) 5462.09,5644.04 5536.5,5644.04 5542.09,5644.04 v1(5632.09,5734.04)
  Inner1 w10: 5536.5,5644.04 5626.5,5734.04 v1(5632.09,5734.04) 5676.5,5734.04 5747.21,5663.33 5797.21,5663.33 5876.5,5584.04 6606.5,5584.04 v1(6636.5,5614.04)
  Bottom Layer w9.92: v1(5432.09,5614.04) 5467.45,5578.69 5467.45,5148.93 H1.11@5535.43,5080.94
PD10: H1.10 JP2.22 U1.79 U2.38 | length 2633.1
  Top Layer w9.92: U1.79@5312.09,5689.56 5402.09,5689.56 v1(5422.09,5709.56) ; v1(5652.09,5679.56) 5602.09,5729.56 5602.09,5779.56 5660.16,5837.63 U2.38@5660.16,5863.6
  Top Layer w10: v1(6502.09,5639.56) 6740.85,5639.56 JP2.22@6741.2,5639.21
  Inner2 w9.92: v1(5522.05,5726.63) 5522.05,5561.46 v1(5593.94,5489.56)
  Bottom Layer w9.92: v1(5422.09,5709.56) 5439.16,5726.63 5449.85,5726.63 5452.58,5729.37 5471.6,5729.37 5474.33,5726.63 v1(5522.05,5726.63) 5605.02,5726.63 v1(5652.09,5679.56) ; v1(5593.94,5489.56) 5583.94,5479.56 5583.94,5032.43 H1.10@5635.43,4980.94
  Bottom Layer w10: v1(5652.09,5679.56) 5682.09,5649.56 5712.09,5649.56 5782.09,5719.56 5832.09,5719.56 5952.09,5599.56 6202.09,5599.56 6262.09,5659.56 6282.09,5659.56 6317.45,5624.21 6486.74,5624.21 v1(6502.09,5639.56)
PD11: H1.9 U1.80 U2.18 | length 1663.3
  Top Layer w9.92: U1.80@5312.09,5709.25 5381.4,5709.25 v1(5384.66,5712.52)
  Top Layer w10: v1(5998.94,5475.75) 5998.94,5425.95 U2.18@6006.61,5418.28
  Inner1 w9.92: v1(5384.66,5712.52) 5389.2,5717.06 5389.2,5749.07 5403.81,5763.68 v1(5403.81,5812.83)
  Inner2 w9.92: v1(5403.81,5812.83) 5437.38,5779.25 5512.09,5779.25 5547.45,5743.9 5547.45,5583.9 5602.09,5529.25 5635.43,5529.25 5638.94,5525.75 5655.43,5509.25 5655.43,5409.25 5605.43,5359.25 5605.43,5110.94 H1.9@5635.43,5080.94
  Inner2 w10: 5638.94,5525.75 5638.94,5595.75 v1(5648.94,5605.75) ; v1(5838.94,5555.75) 5918.94,5555.75 v1(5998.94,5475.75)
  Bottom Layer w10: v1(5648.94,5605.75) 5698.94,5555.75 v1(5838.94,5555.75)
PD12: H1.8 U1.81 U2.23 | length 2013.2
  Top Layer w5.91: U1.81@5312.09,5728.93 5353.7,5728.93 v2(5366.54,5741.77)
  Top Layer w9.92: H1.8@5735.43,4980.94 5782.74,5028.25 5847.25,5028.25 5882.6,5063.6 5882.6,5113.6 5972.6,5203.6 v1(5972.6,5213.6) ; v1(6132.6,5813.6) U2.23@6132.6,5863.6
  Inner2 w9.92: v1(5972.6,5213.6) 5972.6,5239.37 6142.6,5409.37 6142.6,5650.75 6082.48,5710.87 6082.48,5773.49 6122.6,5813.6 v1(6132.6,5813.6)
  Bottom Layer w5.91: v2(5366.54,5741.77) 5398.03,5773.27 5650,5773.27 5685.44,5737.83 5850.79,5737.83 5901.97,5686.65 6108.24,5686.65 v2(6123.93,5670.97)
PD13: H1.7 U1.82 U2.28 | length 1667.8
  Top Layer w9.92: v1(5242.09,5718.62) 5272.09,5748.62 U1.82@5312.09,5748.62 ; v1(5962.09,5808.62) 5975.12,5821.65 U2.28@5975.12,5863.6
  Inner1 w9.92: v1(5752.09,5808.62) 5762.09,5818.62 5952.09,5818.62 v1(5962.09,5808.62)
  Inner2 w9.92: H1.7@5735.43,5080.94 5735.43,5791.97 v1(5752.09,5808.62)
  Bottom Layer w9.92: v1(5242.09,5718.62) 5362.09,5838.62 5722.09,5838.62 v1(5752.09,5808.62)
PD14: H1.6 JP2.7 U1.85 U2.7 | length 2299.1
  Top Layer w9.92: U1.85@5312.09,5807.67 5360.83,5807.67 5383.43,5785.08 5418.72,5785.08 5485.04,5718.75 5485.04,5704.72 5598.87,5590.9 5608.87,5590.9 5660.16,5539.6 U2.7@5660.16,5418.28
  Top Layer w10: U2.7@5660.16,5418.28 5660.16,5377.28 5690.16,5347.28 v1(5690.16,5318.28) ; JP2.7@6741.2,5343.94 6782.44,5343.94 v1(6785.43,5340.94)
  Inner1 w10: v1(5790.16,5058.28) 5790.16,5026.22 H1.6@5835.43,4980.94 5865.43,4980.94 v1(5885.43,4960.94)
  Inner2 w10: v1(5885.43,4960.94) 5911.7,4934.68 6269.17,4934.68 6300.79,4966.3 6300.79,4996.3 6336.15,5031.66 6476.15,5031.66 v1(6785.43,5340.94)
  Bottom Layer w10: v1(5690.16,5318.28) 5690.16,5198.28 5790.16,5098.28 v1(5790.16,5058.28)
PD15: H1.5 JP2.8 U1.86 U2.8 | length 2134
  Top Layer w9.92: U1.86@5312.09,5827.36 5362.09,5827.36 5372.09,5837.36 5411.73,5837.36 5471.73,5777.36 5512.09,5777.36 5688.87,5600.59 5688.87,5421.07 U2.8@5691.65,5418.28
  Top Layer w10: U2.8@5691.65,5418.28 5691.65,5381.22 5709.95,5362.93 5737.01,5362.93 v1(5761.65,5338.28) ; v1(6692.36,5354.02) 6701.96,5363.62 JP2.8@6741.2,5363.62
  Inner1 w10: v1(6342.36,5224.02) 6342.36,5234.02 6472.36,5364.02 6682.36,5364.02 v1(6692.36,5354.02)
  Bottom Layer w10: v1(5761.65,5338.28) 5761.65,5154.73 H1.5@5832.36,5084.02 ; H1.5@5835.43,5080.94 H1.5@5832.36,5084.02 ; v1(6342.36,5224.02) 6332.36,5234.02 6242.36,5234.02 6197.72,5189.37 6197.72,5169.37 6162.36,5134.02 5882.36,5134.02 H1.5@5832.36,5084.02
PDR_ON: R2.1 R4.1 U1.143 | length 622.9
  Top Layer w9.92: U1.143@4562.09,6341.14 4562.09,6291.14 v1(4572.09,6281.14) ; v1(4572.09,6531.14) 4572.09,6521.37 R2.1@4602.52,6490.94
  Top Layer w10: R4.1@4433.92,6487.94 4446.74,6500.76 4446.74,6515.79 4482.09,6551.14 4552.09,6551.14 v1(4572.09,6531.14)
  Inner2 w9.92: v1(4572.09,6281.14) 4662.09,6371.14 4662.09,6441.14 v1(4572.09,6531.14)
PE0: H2.37 U1.141 U2.39 | length 2456.2
  Top Layer w9.92: v1(4601.46,6251.14) U1.141@4601.46,6341.14 ; v1(5371.46,5891.14) 5411.46,5891.14 5441.46,5861.14 5441.46,5828.27 5457.91,5811.82 v1(5469.74,5811.82) ; v1(5571.46,5811.14) 5596.2,5811.14 5628.66,5843.6 U2.39@5628.66,5863.6
  Inner1 w9.92: v1(4601.46,6251.14) 4671.46,6251.14 4781.46,6141.14 4781.46,5941.14 4771.46,5931.14 4771.46,5811.14 v1(4831.46,5751.14) ; v1(5469.74,5811.82) 5489.07,5831.14 5551.46,5831.14 v1(5571.46,5811.14)
  Inner2 w9.92: H2.37@4235.43,6790.94 4281.46,6744.92 4281.46,6531.14 4561.46,6251.14 v1(4601.46,6251.14)
  Bottom Layer w9.92: v1(4831.46,5751.14) 4871.46,5711.14 4891.46,5711.14 4911.46,5731.14 4961.46,5731.14 4981.46,5711.14 5091.46,5711.14 5126.82,5746.5 5156.82,5746.5 5262.88,5852.57 5332.88,5852.57 v1(5371.46,5891.14)